# Altium PCB LightBoard.PcbDoc
Units mm, origin at the board's own origin, x right, y up, seen from the top; angles counter-clockwise.
Board outline 41.17 x 38.48 mm, 2 copper layers (Top Layer, Bottom Layer), stack 1.534 mm thick; 15 components, 11 nets, 32 pads, 0 vias.
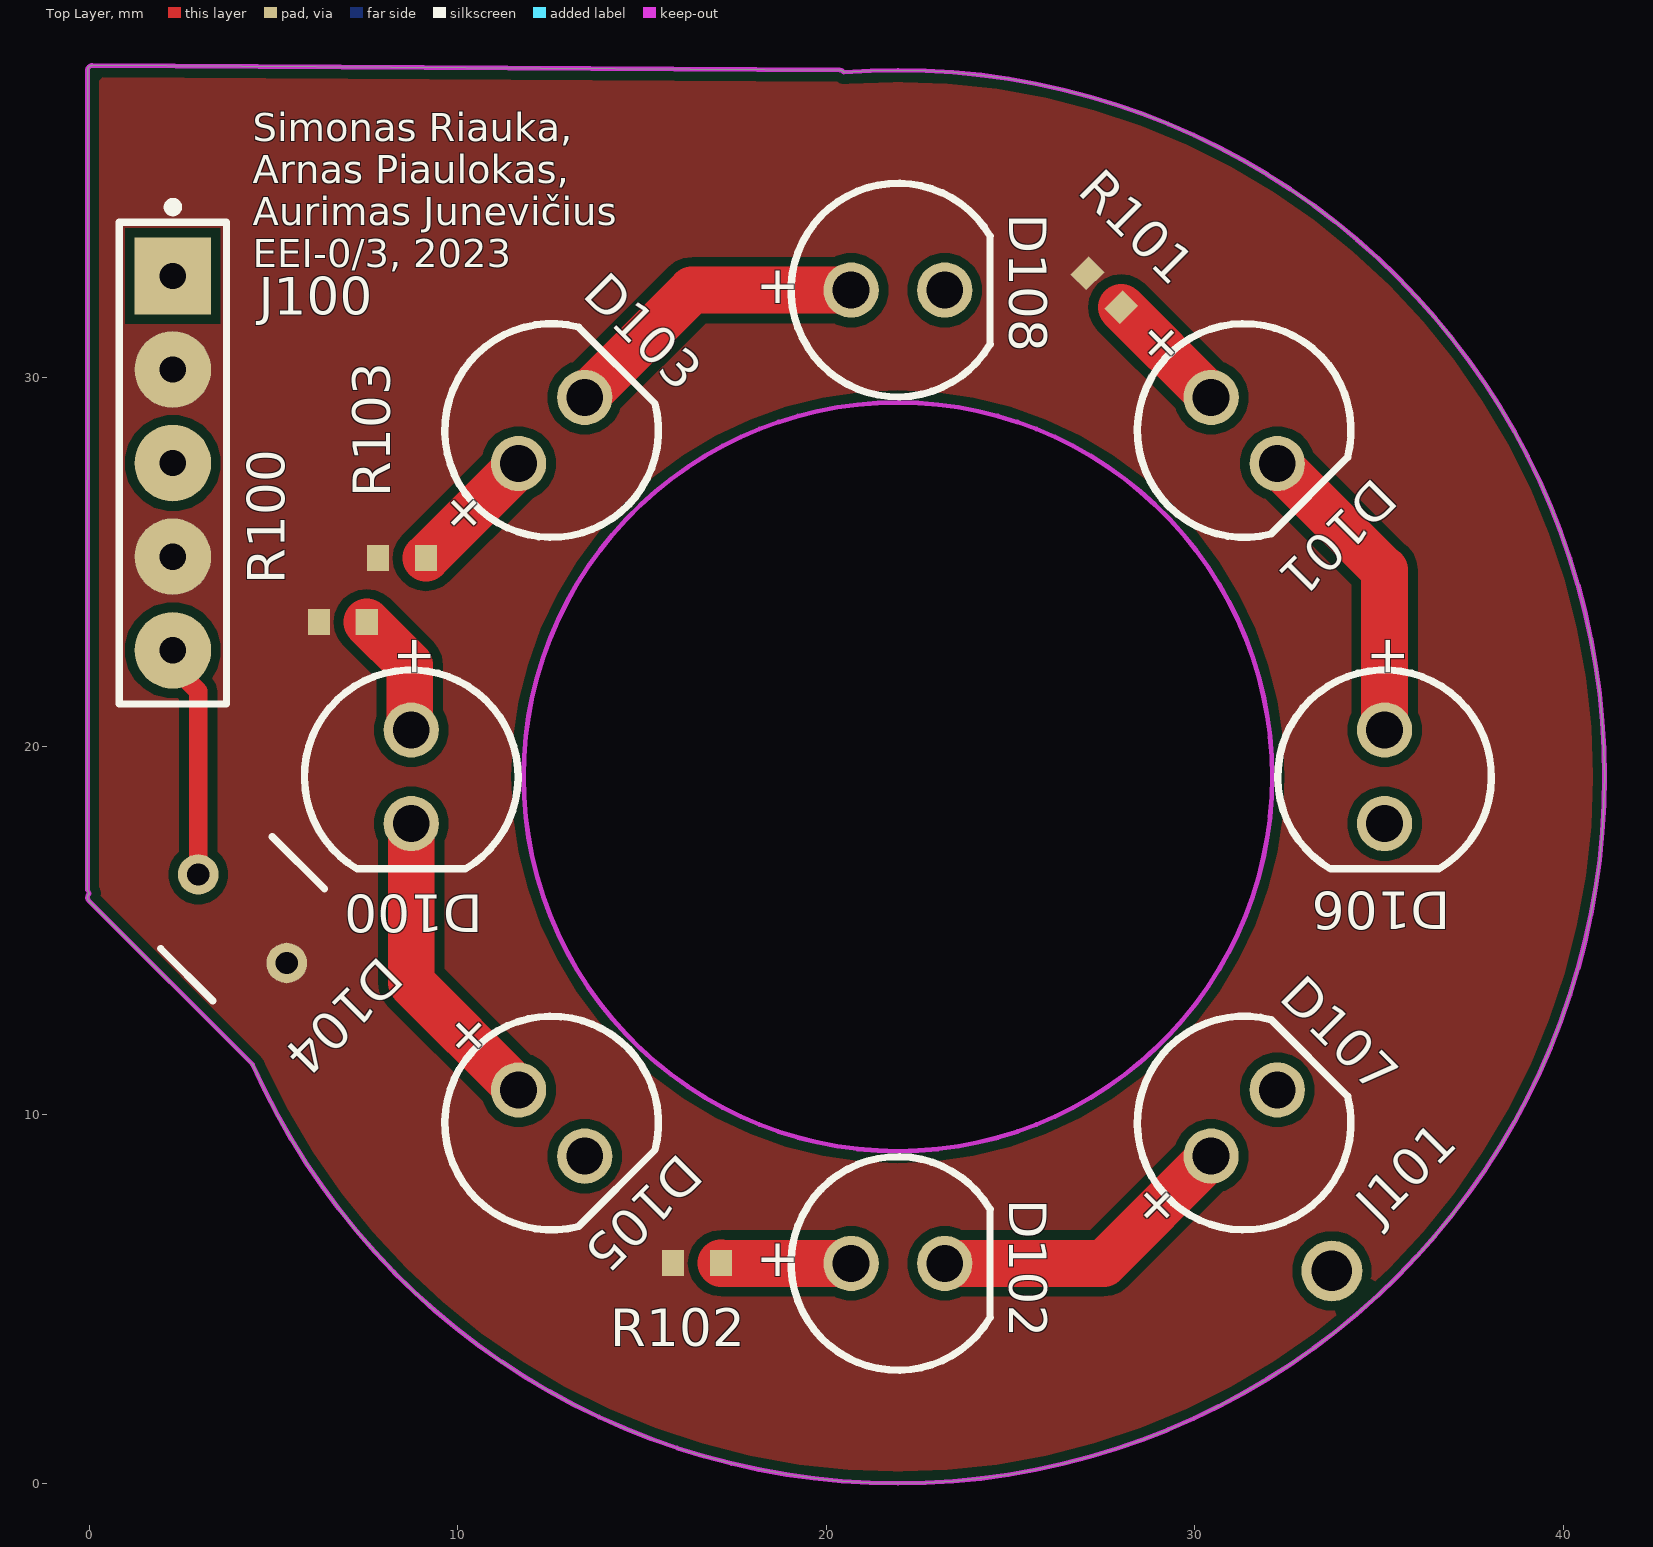
[diagram p0: Top Layer view]
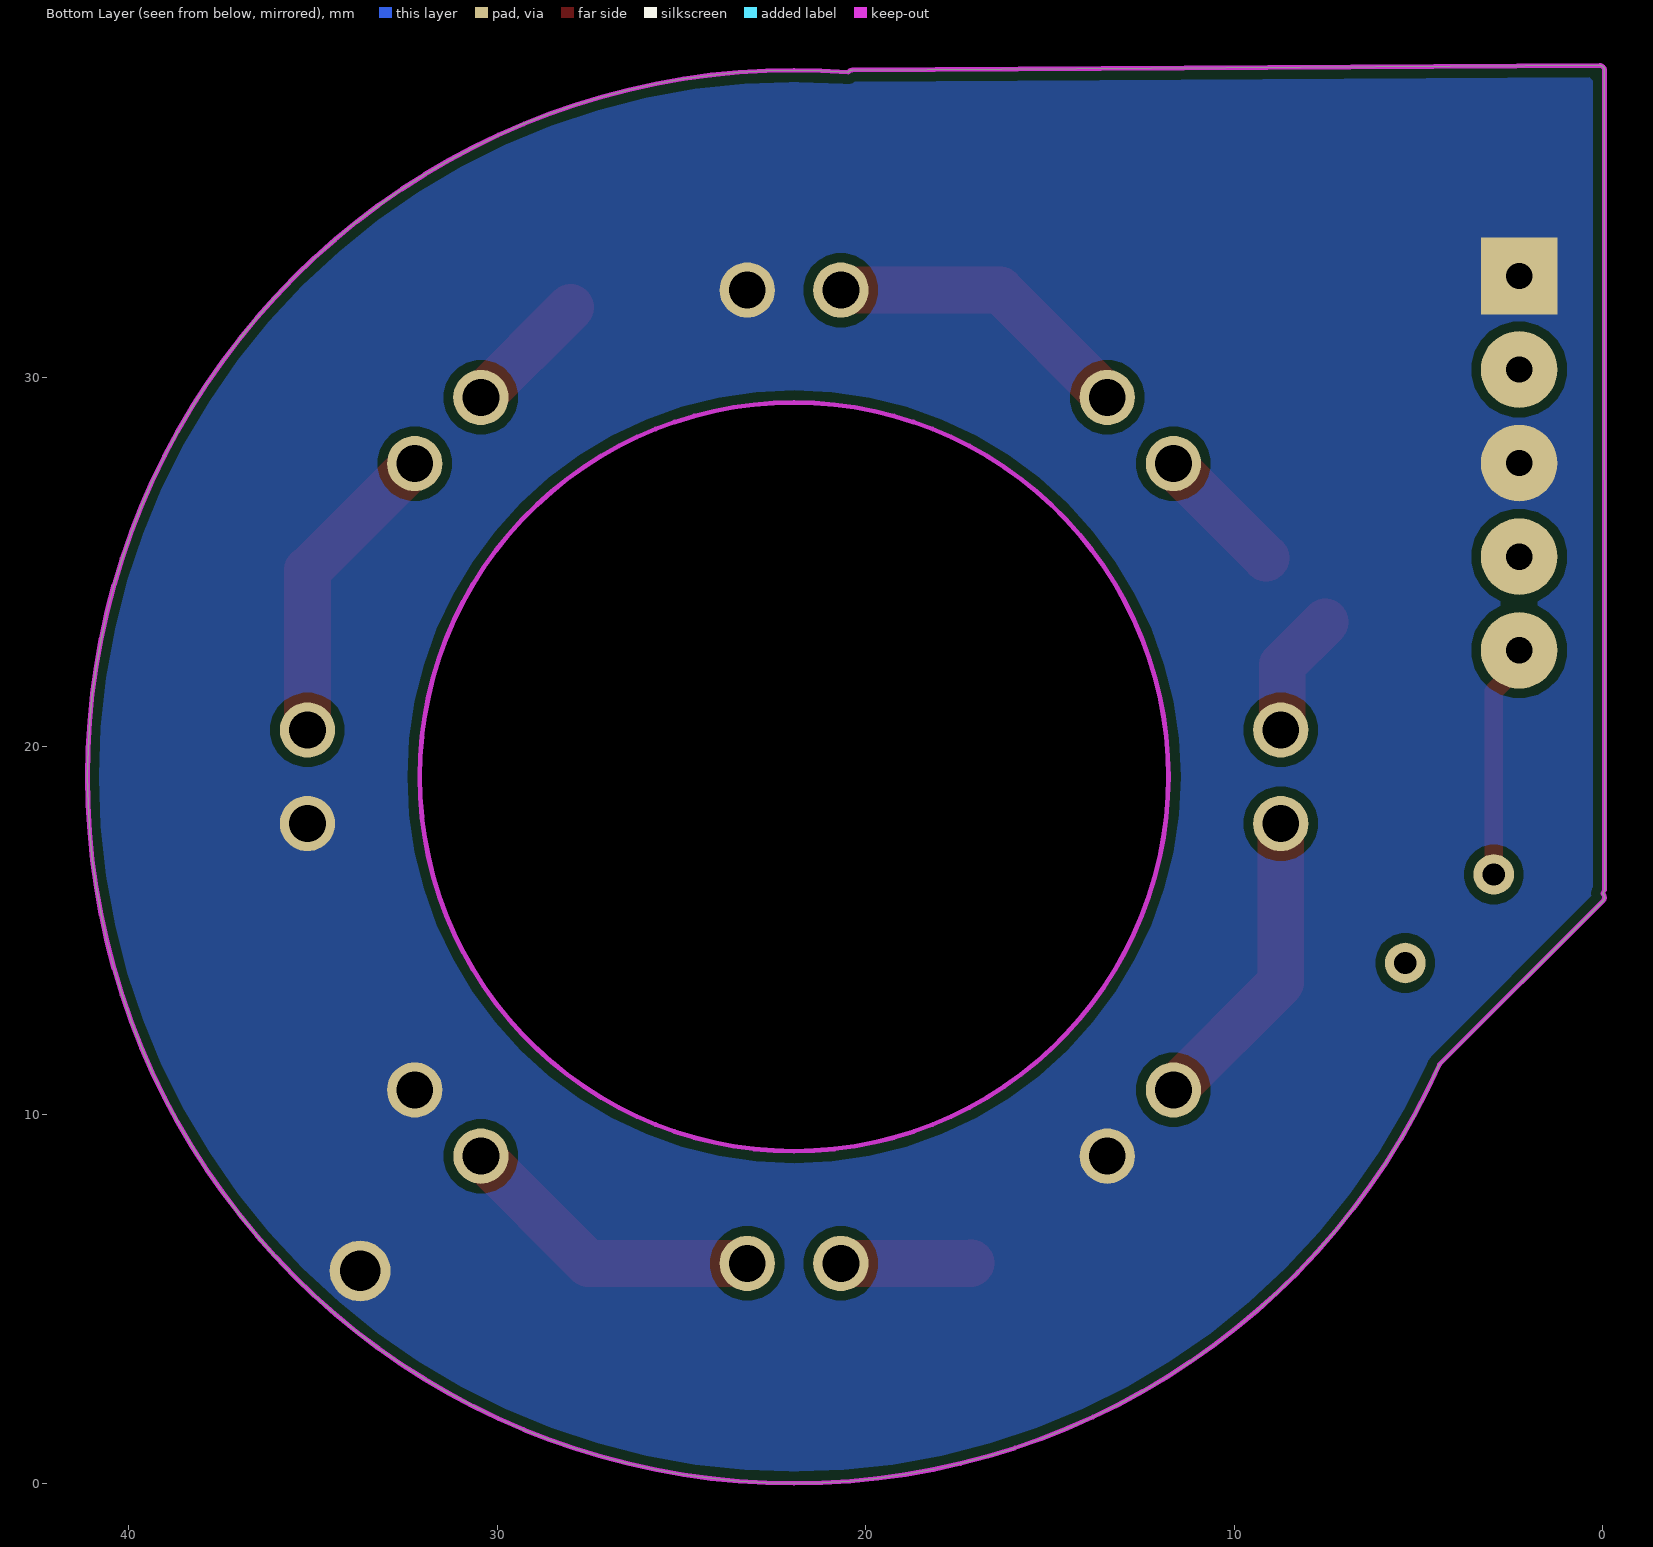
[diagram p1: Bottom Layer view, seen from below]
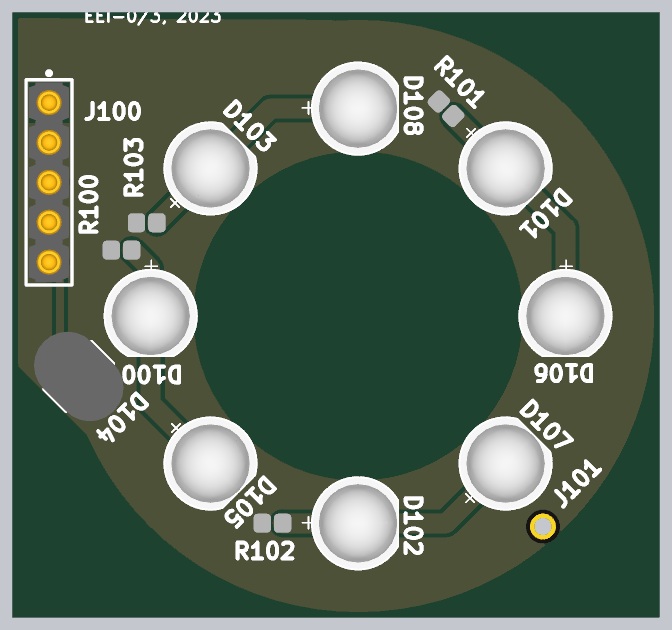
[diagram p2: 3D render of the assembled board from above, using the file's embedded part models]

## Layer stack, top to bottom
Top Solder: solder mask 0.0127, Solder Resist, Dk 3.3
Top Layer: signal copper 0.0178
Dielectric1: core 1.4986, FR-4, Dk 4.3
Bottom Layer: signal copper 0.0178
Bottom Solder: solder mask 0.0127, Solder Resist, Dk 3.3

## Board outline
-0.013,15.811 cw(c0.077,15.901) 0.001,16.004 -0.05,16.106 -0.049,38.354 cw(c0.078,38.354) 0.079,38.482 20.37,38.358 cw(c20.369,38.23) 20.477,38.298 cw(c21.946,19.178) 21.946,38.354 cw(c21.946,19.177) 41.123,19.177 cw(c21.946,19.177) 21.946,0 cw(c21.946,19.177) 4.43,11.368
cut-out: 11.786,19.177 ccw(c21.946,19.177) 21.946,9.017 ccw(c21.946,19.177) 32.106,19.177 ccw(c21.946,19.177) 21.946,29.337 ccw(c21.946,19.177)

## Design rules (kind name [scope] priority, off if disabled: settings)
Clearance [All] p1: gap=0.254 ignorepadtopadclearanceinfootprint=FALSE
DiffPairsRouting [All] p1: maxlimit=0.254 minlimit=0.254 mostfreqgap=0.254 toplayer_minwidth=0.254 toplayer_maxwidth=0.254 toplayer_prefwidth=0.254 bottomlayer_minwidth=0.254 bottomlayer_maxwidth=0.254 bottomlayer_prefwidth=0.254 maxuncoupledlength=12.7
HoleSize [All] p1: absolutevalues=TRUE maxlimit=7.62 minlimit=0.254 maxpercent=80.000 minpercent=20.000
MinimumAnnularRing [All] p1: minimumring=0.152
MinimumSolderMaskSliver [All] p1: minsoldermaskwidth=0.152
PasteMaskExpansion [All] p1: expansion=0.254
PlaneClearance [All] p1: clearance=0.381
PlaneConnect [All] p1: planeconnectstyle=Direct reliefexpansion=0.508 reliefentries=4 reliefconductorwidth=0.254 reliefairgap=0.254
PolygonConnect [All] p1: connectstyle=Direct reliefconductorwidth=0.254 reliefentries=4 polygonreliefangle="90 Angle" airgapwidth=0.254
RoutingVias [All] p1: holewidth=0.3 width=0.604 viastyle="Through Hole" minholewidth=0.3 minwidth=0.604 maxholewidth=100 maxwidth=1.27
SMDNeckDown [All] p1 off: percent=100.000
SilkToSolderMaskClearance SilkscreenOverComponentPads [IsPad] p1: minsilkscreentomaskgap=0.254 clearancetoexposedcopper=TRUE
SolderMaskExpansion [All] p1: expansion=0.254 istentingtop=FALSE
Width [All] p1: maxlimit=2.54 minlimit=0.025 preferedwidth=0.254 minimp=50.000000 maximp=50.000000 favimp=50.000000
23 further rules are at their usual default settings.

## Components (designator, comment, footprint, x,y, rotation, side; value= is the part's Value field where it differs from the comment)
D100 "151053BS04500" WL-TMRW_D5.8H11.7 8.738,19.177 r270 top
D101 "151053BS04500" WL-TMRW_D5.8H11.7 31.344,28.575 r315 top
D102 "151053BS04500" WL-TMRW_D5.8H11.7 21.946,5.969 r0 top
D103 "151053BS04500" WL-TMRW_D5.8H11.7 12.548,28.575 r45 top
D104 "PDV-P8103" PDVP8103 2.955,16.527 r225 top
D105 "151053BS04500" WL-TMRW_D5.8H11.7 12.548,9.779 r315 top
D106 "151053BS04500" WL-TMRW_D5.8H11.7 35.154,19.177 r270 top
D107 "151053BS04500" WL-TMRW_D5.8H11.7 31.344,9.779 r45 top
D108 "151053BS04500" WL-TMRW_D5.8H11.7 21.946,32.385 r0 top
J100 "816-22-005-10-003101" FP-816-22-005-10-003101-MFG 2.266,27.689 r270 top
J101 "Header_2.54_1x1" HEADER_2.54_1x1 33.1,5.86 r90 top
R100 "0402" 0402_FOOTPRINT 7.529,23.374 r180 top
R101 "0402" 0402_FOOTPRINT 28.008,31.92 r135 top
R102 "0402" 0402_FOOTPRINT 17.144,5.978 r180 top
R103 "0402" 0402_FOOTPRINT 9.134,25.113 r180 top

## Footprints (in the part's own frame and the unit in brackets; to place one, negate y for a bottom-side part, rotate by r counter-clockwise, add the part's x,y. Pads: shape width x height; smd on the part's side, far side on the other; paste and mask are expansions set on the pad)
0402_FOOTPRINT [mm]
  rect 0.6x0.7 smd: 1(0,0) 2(1.3,0)
FP-816-22-005-10-003101-MFG [mm]
  rect 2.08x2.08 hole 0.71 paste-2539.97 mask+0: 1(-5.08,0)
  round 2.08 hole 0.71 paste-2539.97 mask+0: 2(-2.54,0) 3(0,0) 4(2.54,0) 5(5.08,0)
  silkscreen extent -7.07,-1.46 6.54,1.46, body extent -6.51,-1.43 6.51,1.43, height 0.25
HEADER_2.54_1x1 [mm]
  round 1.65 hole 1.1: 0(-0.094,-0.624)
PDVP8103 [mm]
  round 1.1 hole 0.6: 1(0,0) 2(0,3.4)
  silkscreen extent -2.14,0.7 2.14,2.7, body extent -2.14,-1.43 2.14,4.83, height 2.48
WL-TMRW_D5.8H11.7 [mm] "THT Mono-color Round LED, 2-leads"
  round 1.5 hole 1: 1(1.27,0) 2(-1.27,0)
  silkscreen extent -2.9,-2.9 2.5,2.9, body extent -2.9,-2.9 2.5,2.9, height 11.7

## Part data
D100 D101 D102 D105 D106 D107 D108: library part CMP-1489-00006-2, Case/Package=Radial, Color=Blue, Forward Current=100mA, Forward Voltage=2.7V, Max Operating Temperature=85°C, Max Reverse Voltage (DC)=5V, Min Operating Temperature=-40°C, Test Current=20mA, ComponentLink1Description=Buy, Dominant Wavelength=465nm, Height=8.6mm, Length=5mm, Lens Size=5mm, Lens Style="Circular, Clear, Round", Luminous Intensity=2cd, Mount="Through Hole", NexarPartId=29717816, Packaging=Bulk, Peak Wavelength=461nm, REACH SVHC=Unknown, RoHS=Compliant, Viewing Angle=45°, Wavelength=465nm, Width=5mm
  D100 D101 D105 D106: ComponentLink1URL=https://www.mouser.lt/ProductDetail/Vishay-Semiconductors/TSAL6400?qs=oSAwVt7aKTHCOCv1ythi7g%3D%3D
  D102 D107 D108: ComponentLink1URL=https://www.mouser.lt/ProductDetail/Vishay-Semiconductors/TSHF5210?qs=%2Fjqivxn91cfAnyW9i5Zlpg%3D%3D
D103: library part CMP-1489-00006-2, "https://www.lemona.lt/sviesos-diodas-o5mm-ir-skaidrus-30.html", Case/Package=Radial, Color=Blue, Forward Current=100mA, Forward Voltage=2.7V, Max Operating Temperature=85°C, Max Reverse Voltage (DC)=5V, Min Operating Temperature=-40°C, Test Current=20mA, ComponentLink1Description=Buy, ComponentLink1URL=https://www.mouser.lt/ProductDetail/Vishay-Semiconductors/TSHF5210?qs=%2Fjqivxn91cfAnyW9i5Zlpg%3D%3D, Dominant Wavelength=465nm, Height=8.6mm, Length=5mm, Lens Size=5mm, Lens Style="Circular, Clear, Round", Luminous Intensity=2cd, Mount="Through Hole", NexarPartId=29717816, Packaging=Bulk, Peak Wavelength=461nm, REACH SVHC=Unknown, RoHS=Compliant, Viewing Angle=45°, Wavelength=465nm, Width=5mm
D104: Manufacturer_Name="ADVANCED PHOTONIX", ComponentLink1Description=Buy, ComponentLink1URL=https://www.mouser.lt/ProductDetail/Advanced-Photonix/PDV-P8103?qs=tlsG%2FOw5FFiMv0vIkPUhuA%3D%3D, Datasheet Link=https://media.digikey.com/pdf/Data%20Sheets/Photonic%20Detetectors%20Inc%20PDFs/PDV-P8103.pdf, Height=2.38mm, Manufacturer_Part_Number=PDV-P8103
J100: library part CMP-07791-000028-1, "CONN SPRING PISTON 5POS PCB", Current Rating=2A, Flammability Rating="UL94 V-0", Insulation Resistance=10GR, Package Quantity=1, Voltage Rating=150V, Contact Gender=Male, Contact Material="Copper Alloy", Contact Plating=Gold, Housing Material=Thermoplastic, Material="Copper Alloy", Mount="Through Hole", Number of Contacts=5, Number of Positions=5, Number of Rows=1, Packaging=Bulk, Pitch=2.54mm, RoHS Compliant=Yes, Series=816, Termination="Through Hole"
R100 R101 R102 R103: library part Resistor_0402, "0402 resistor"

## Nets (pads, with @x,y where several pads share a name; then routed paths per layer and width w, separated by ;. In a path a pad name is that pad's centre, name@x,y a point inside that pad or via, vN(x,y) a via of type N, cw(c..) or ccw(c..) an arc to the next point about the centre after c; other vN are vias at no path point)
ADC_LIGHT_SENSOR: D104.1 J100.5 | length 6.4
  Top Layer w0.508: J100.5 2.266,22.184 2.955,21.494 D104.1
GND: D105.1 D106.1 D107.1 D108.1 J100.1 J100.3 J101.0
NetD100_1: D100.1 D105.2 | length 8.4
  Top Layer w1.27: D100.1 8.737,13.589 D105.2@11.649,10.677
NetD100_2: D100.2 R100.1 | length 3.4
  Top Layer w1.27: R100.1 8.694,22.209 8.694,20.491 D100.2
NetD101_1: D101.1 D106.2 | length 8.4
  Top Layer w1.27: D101.1@32.241,27.677 35.128,24.79 ; D106.2 35.153,24.79
NetD101_2: D101.2 R101.1 | length 3.5
  Top Layer w1.27: R101.1 30.446,29.482 D101.2
NetD102_1: D102.1 D107.2 | length 8.4
  Top Layer w1.27: D102.1 27.534,5.969 D107.2
NetD102_2: D102.2 R102.1 | length 3.5
  Top Layer w1.27: R102.1 17.154,5.969 D102.2
NetD103_1: D103.1 D108.2 | length 8.4
  Top Layer w1.27: D103.1 16.358,32.385 D108.2
NetD103_2: D103.2 R103.1 | length 3.6
  Top Layer w1.27: R103.1 11.65,27.628 D103.2
VCC: D104.2 J100.2 J100.4 R100.2 R101.2 R102.2 R103.2

## Polygon pours and split planes (outlines as drawn)
GND on Bottom Layer "NONET_L-01_P-001" (solid, pour order 0): -0.013,15.811 cw(c0.077,15.901) 0.001,16.004 -0.05,16.106 -0.049,38.354 cw(c0.078,38.354) 0.079,38.482 20.37,38.358 cw(c20.369,38.23) 20.477,38.298 cw(c21.946,19.178) 21.946,38.354 cw(c21.946,19.177) 41.123,19.177 cw(c21.946,19.177) 21.946,0 cw(c21.946,19.177) 4.43,11.368
VCC on Top Layer "NONET_L-01_P-001" (solid, pour order 1): -0.013,15.811 cw(c0.077,15.901) 0.001,16.004 -0.05,16.106 -0.049,38.354 cw(c0.078,38.354) 0.079,38.482 20.37,38.358 cw(c20.369,38.23) 20.477,38.298 cw(c21.946,19.178) 21.946,38.354 cw(c21.946,19.177) 41.123,19.177 cw(c21.946,19.177) 21.946,0 cw(c21.946,19.177) 4.43,11.368

## Keep-outs
Keep-Out Layer:
  lines w0.127: -0.05,16.106 -0.049,38.354 cw(c0.078,38.354) 0.079,38.482 20.37,38.358 cw(c20.369,38.23) 20.477,38.298 cw(c21.946,19.178) 21.946,38.354 cw(c21.946,19.177) 41.123,19.177 cw(c21.946,19.177) 21.946,0 cw(c21.946,19.177) 4.43,11.368 -0.013,15.811 cw(c0.077,15.901) 0.001,16.004 -0.05,16.106 ; 11.786,19.177 cw(c21.946,19.177) 21.946,29.337 cw(c21.946,19.177) 32.106,19.177 cw(c21.946,19.177) 21.946,9.017 cw(c21.946,19.177) 11.786,19.177

## Silkscreen, mask and mechanical layers (free items; w line width, h text height)
Top Overlay:
  text "Simonas Riauka, / Arnas Piaulokas, / Aurimas Junevičius / EEI-0/3, 2023" at 4.43,33.002 h0.76
Board:
  circle w0.254: c21.938,19.173 r10.16
  circle w0.254: c21.946,19.177 r19.05
  circle w0.254: c21.937,19.213 r7
  lines w0.254: 2.266,32.769 4.026,32.769 ; 3.929,5.713 3.929,32.766 30.929,32.766 30.929,5.766 3.929,5.766 ; 9.451,6.528 0.077,15.901 ; 22.645,38.23 20.369,38.23 0.078,38.354 0.077,16.106 0.077,15.901 ; 0.077,15.901 0.077,15.901
  text "18" at 6.129,7.566 h1.02 r270
  text "17" at 8.629,7.566 h1.02 r270

## Text inside footprints (layer, text, board x,y; h text height)
D100: Top Overlay "+" at 8.388,23.027 h1.02 r270
D101: Top Overlay "+" at 28.374,31.05 h1.02 r315
D102: Top Overlay "+" at 18.096,5.619 h1.02
D103: Top Overlay "+" at 10.073,25.605 h1.02 r45
D105: Top Overlay "+" at 9.578,12.254 h1.02 r315
D106: Top Overlay "+" at 34.804,23.027 h1.02 r270
D107: Top Overlay "+" at 28.869,6.809 h1.02 r45
D108: Top Overlay "+" at 18.096,32.035 h1.02